# Altium PCB H_bridge_PCB.PcbDoc
Units mil, origin at the board's own origin, x right, y up, seen from the top; angles counter-clockwise.
Board outline 3775 x 4000 mil, 2 copper layers (Top Layer, Bottom Layer); 43 components, 40 nets, 147 pads, 0 vias.
Unrouted connection lines stored in the file: 88.
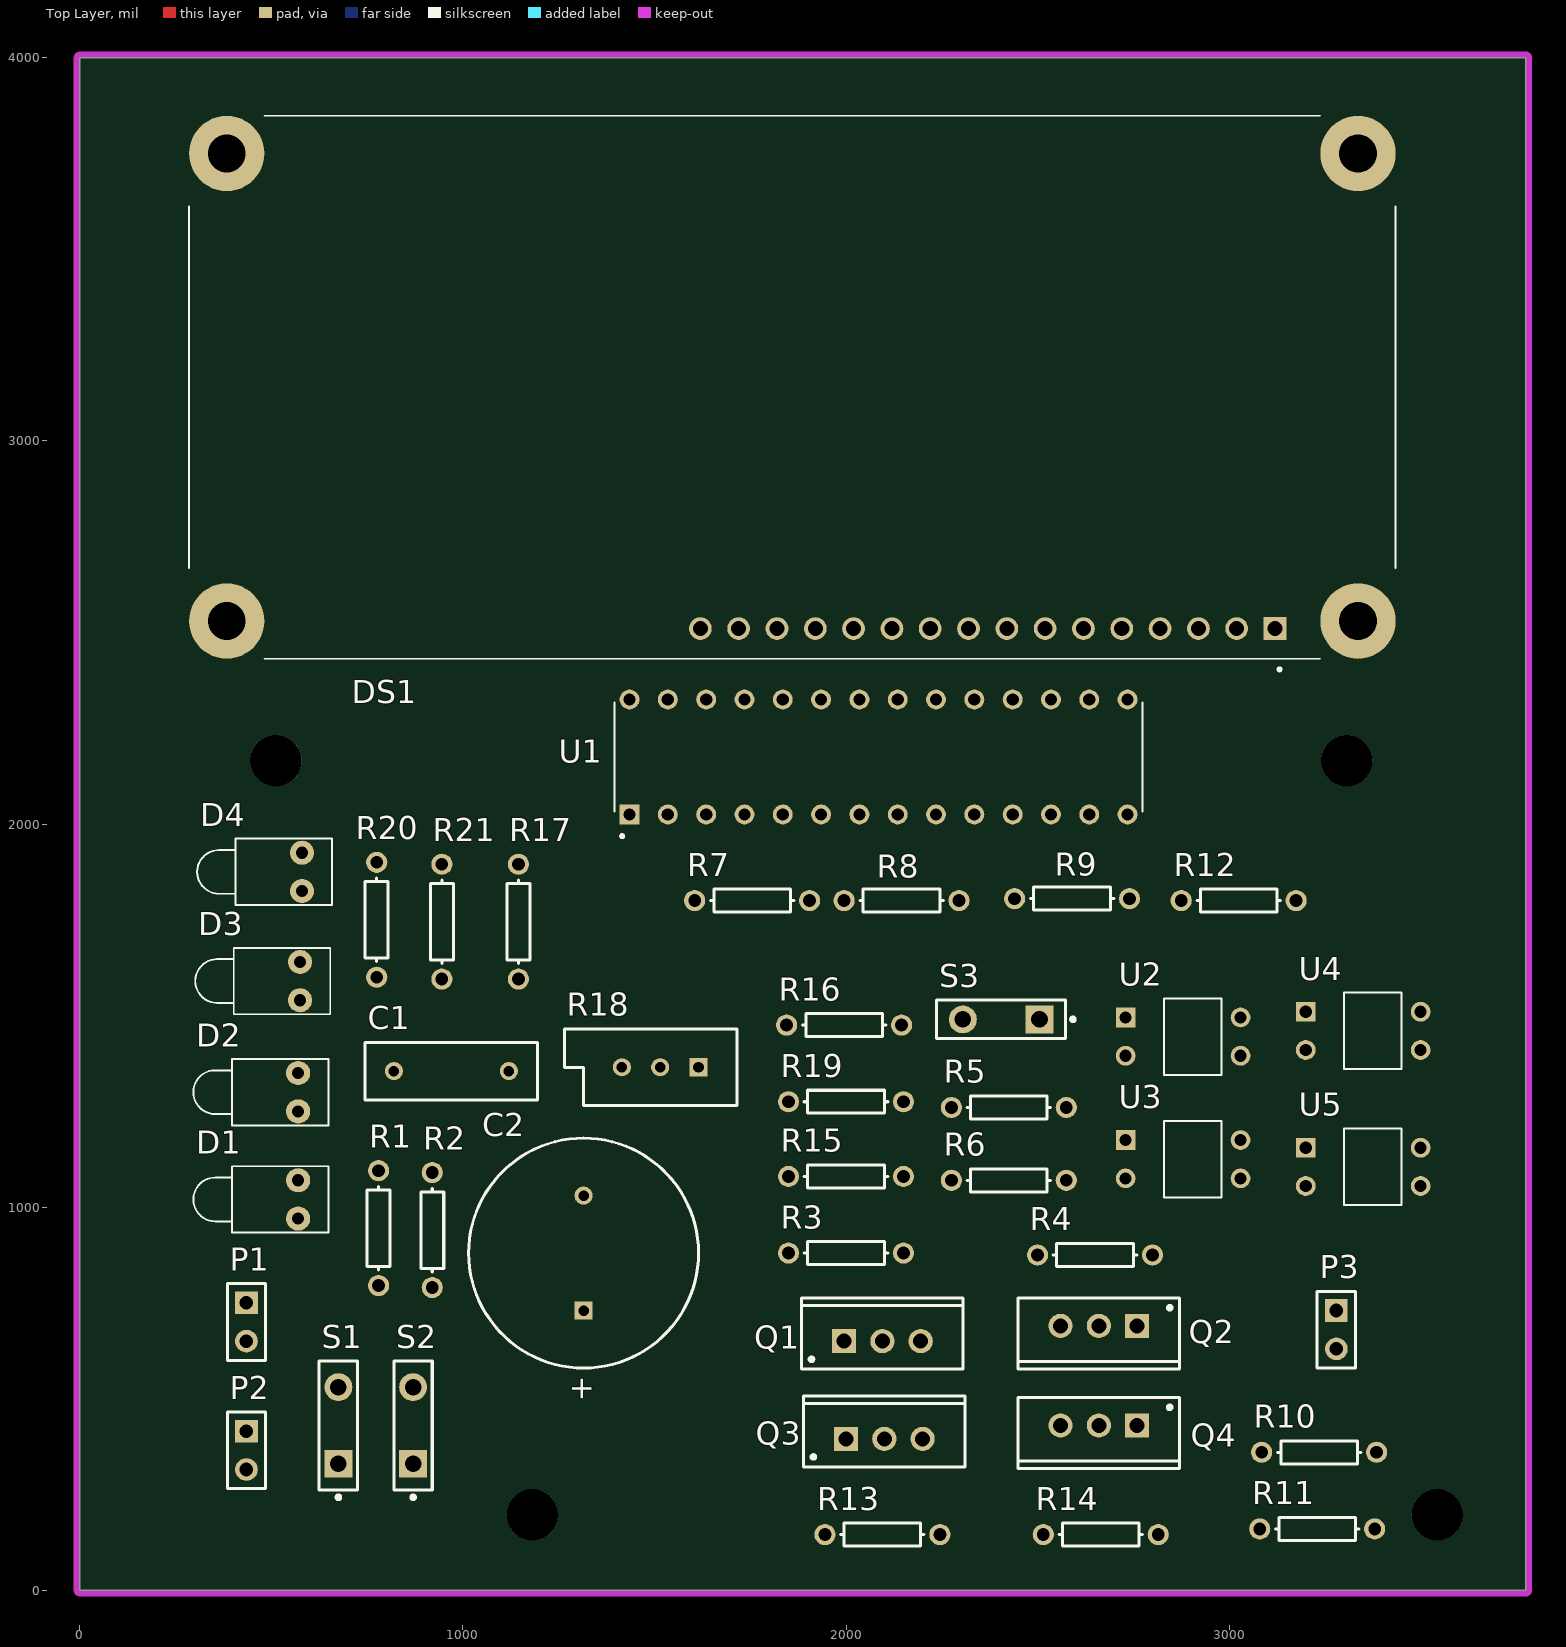
[diagram p0: Top Layer view]
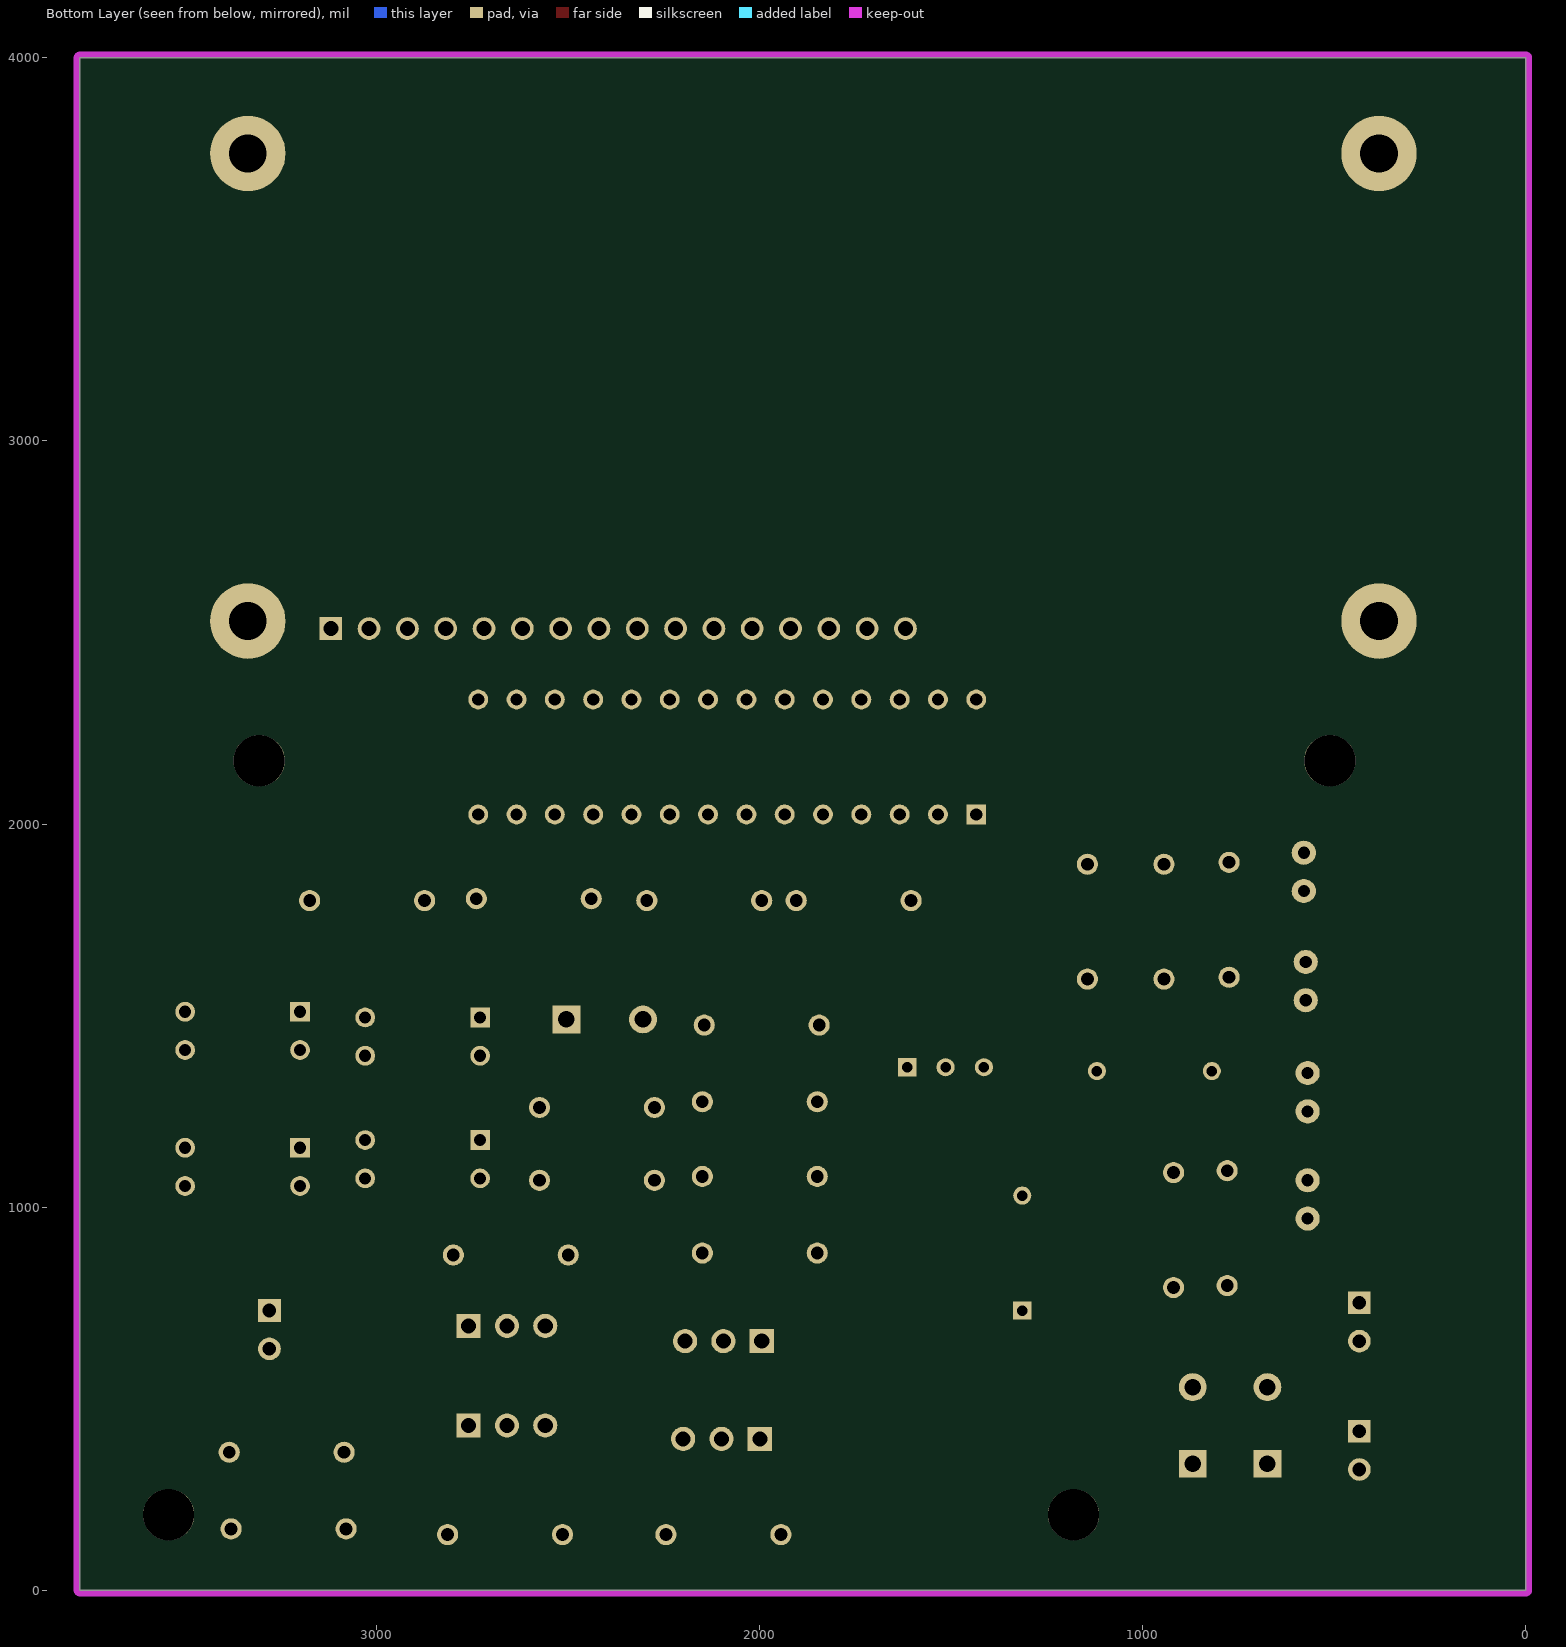
[diagram p1: Bottom Layer view, seen from below]

## Layer stack, top to bottom
Top Solder: solder mask 0.4, Solder Resist, Dk 3.5
Top Layer: signal copper 1.4
Dielectric 1: dielectric 12.6, FR-4, Dk 4.8
Bottom Layer: signal copper 1.4
Bottom Solder: solder mask 0.4, Solder Resist, Dk 3.5

## Board outline
0,0 3775,0 3775,4000 0,4000

## Design rules (kind name [scope] priority, off if disabled: settings)
BoardOutlineClearance [All] p1: gap=7.87 ignorepadtopadclearanceinfootprint=FALSE except(15.75: Arc-SplitBarrior Arc-SplitContinuation Track-SplitBarrior Track-SplitContinuation SMDPad-SplitBarrior SMDPad-SplitContinuation THPad-SplitBarrior THPad-SplitContinuation Via-SplitBarrior Via-SplitContinuation Fill-SplitBarrior Fill-SplitContinuation Poly-SplitBarrior Poly-SplitContinuation Region-SplitBarrior Region-SplitContinuation Text-SplitBarrior Text-SplitContinuation)
Clearance "Clearance Bottom Layer" [OnLayer('Bottom Layer')] p1: gap=8 ignorepadtopadclearanceinfootprint=TRUE except(10: Arc-Text Track-Text SMDPad-Text THPad-Text Via-Text Fill-Text Poly-Text Region-Text Text-Text)
Clearance "Clearance Top Layer" [OnLayer('Top Layer')] p2: gap=8 ignorepadtopadclearanceinfootprint=TRUE except(10: Arc-Text Track-Text SMDPad-Text THPad-Text Via-Text Fill-Text Poly-Text Region-Text Text-Text)
Clearance [All] p3: gap=7.87 ignorepadtopadclearanceinfootprint=FALSE except(3.5: Arc-Arc Arc-Track Arc-SMDPad Track-Track Track-SMDPad SMDPad-SMDPad; 5: Arc-Via Track-Via SMDPad-Via THPad-Via Via-Via; 10: Arc-Text Track-Text SMDPad-Text THPad-Text Via-Text Fill-Text Poly-Text Region-Text Text-Text)
HoleSize [All] p1: absolutevalues=TRUE maxlimit=248.03 minlimit=7.87 maxpercent=80.000 minpercent=20.000
MinimumAnnularRing [All] p1: minimumring=3
MinimumSolderMaskSliver [All] p1: minsoldermaskwidth=3.94
PolygonConnect PolygonConnect_1 [All] p1: thpad.connectstyle=Relief thpad.reliefconductorwidth=20 thpad.reliefentries=4 thpad.polygonreliefangle="90 Angle" thpad.airgapwidth=10 smdpad.connectstyle=Relief smdpad.reliefconductorwidth=20 smdpad.reliefentries=4 smdpad.polygonreliefangle="90 Angle" smdpad.airgapwidth=10 via.connectstyle=Direct via.reliefconductorwidth=20 via.reliefentries=4 via.polygonreliefangle="90 Angle" via.airgapwidth=10
RoutingVias [All] p1: holewidth=28 width=50 viastyle="Through Hole" minholewidth=8 minwidth=16 maxholewidth=28 maxwidth=50
SilkToSilkClearance [All] p1: silktosilkclearance=3.94
SilkToSolderMaskClearance [IsPad] p1: minsilkscreentomaskgap=3.94 clearancetoexposedcopper=TRUE
SolderMaskExpansion [All] p1: expansion=4 istentingtop=FALSE
Width POWER [InNetClass('POWER')] p1: maxlimit=25 minlimit=5 preferedwidth=25 minimp=50.000000 maximp=50.000000 favimp=50.000000
Width [InNetClass('SIGNALS')] p2: maxlimit=25 minlimit=5 preferedwidth=15 minimp=50.000000 maximp=50.000000 favimp=50.000000
26 further rules are at their usual default settings.

## Classes and differential pairs
net class SIGNALS: LCD_D4 LCD_D5 LCD_D6 LCD_D7 LCD_EN LCD_RS NetD1_1 NetD2_1 NetD3_1 NetD4_1 NetDS1_3 NetDS1_15 NetP1_2 NetP2_2 NetP3_1 NetP3_2 NetQ1_1 NetQ2_1 NetQ3_1 NetQ4_1 NetR5_1 NetR6_1 NetR7_1 NetR7_2 NetR8_1 NetR8_2 NetR9_1 NetR9_2 NetR10_2 NetR11_2 NetR12_1 NetR12_2 NetR18_3 NetR19_2 NetR20_2 NetR21_2
net class POWER: +5 +12 GND MCUGND
net class LCD_D[4..7]: LCD_D4 LCD_D5 LCD_D6 LCD_D7
component class "U_Power Supply": D1 D3 P1 P3 R1 R2 S1 S3
component class U_Microcontroller: C1 U1
component class U_H_bridge: C2 Q1 Q3 R3 R5 R7 R9 R11 R13 U2 U4 U5
component class Top_level: D3 D4 DS1 P3 R15 R16 R17 R18 R20 R21 S3

## Components (designator, comment, footprint, x,y, rotation, side; value= is the part's Value field where it differs from the comment)
C1 "Cap" RAD-0.3 970,1355 r0 top value=0.1uF
C2 "Cap Pol1" RB7.6-15 1315,880 r270 top value=100uF
D1 "POWER LED" LED-1 570,1020 r180 top
D2 "5V LED" LED-1 570,1300 r180 top
D3 "LED1" LED-1 575,1590 r180 top
D4 "LED1" LED-1 580,1875 r180 top
DS1 "LCD2X16" LCD_LCD2X16 1860,3140 r180 top
P1 "12VIN" HDR1X2 435,750 r270 top
P2 "5VIN" HDR1X2 435,415 r270 top
P3 "OUTPUT" HDR1X2 3280,730 r270 top
Q1 "IRF4905" TO-220AB 2095,650 r0 top
Q2 "IRF4905" TO-220AB 2660,690 r180 top
Q3 "IRLZ44n" TO-220AB 2100,395 r0 top
Q4 "IRLZ44n" TO-220AB 2660,430 r180 top
R1 "Res1" AXIAL-0.3 780,945 r270 top value=510R
R2 "Res1" AXIAL-0.3 920,940 r270 top value=330R
R3 "Res1" AXIAL-0.3 2000,880 r0 top value=470R
R4 "Res1" AXIAL-0.3 2650,875 r180 top value=470R
R5 "Res1" AXIAL-0.3 2425,1260 r180 top value=750R
R6 "Res1" AXIAL-0.3 2425,1070 r0 top value=750R
R7 "Res1" AXIAL-0.3 1755,1800 r0 top value=330R
R8 "Res1" AXIAL-0.3 2145,1800 r0 top value=330R
R9 "Res1" AXIAL-0.3 2590,1805 r180 top value=330R
R10 "Res1" AXIAL-0.3 3235,360 r0 top value=750R
R11 "Res1" AXIAL-0.3 3230,160 r0 top value=750R
R12 "Res1" AXIAL-0.3 3025,1800 r180 top value=330R
R13 "Res1" AXIAL-0.3 2095,145 r0 top value=470R
R14 "Res1" AXIAL-0.3 2665,145 r180 top value=470R
R15 "Res1" AXIAL-0.3 2000,1080 r0 top value=1K
R16 "Res1" AXIAL-0.3 1995,1475 r0 top value=1K
R17 "Res1" AXIAL-0.3 1145,1745 r90 top value=100R
R18 "RPot" VR5 1515,1365 r180 top value=10K
R19 "Res1" AXIAL-0.3 2000,1275 r0 top value=10K
R20 "Res1" AXIAL-0.3 775,1750 r90 top value=330R
R21 "Res1" AXIAL-0.3 945,1745 r90 top value=330R
S1 "POWER SWITCH" SPST-2 675,430 r90 top
S2 "5V Switch" SPST-2 870,430 r90 top
S3 "SW-SPST" SPST-2 2405,1490 r180 top
U1 "PIC16F886-I/SP" DIP762W46P254L3467H457Q28 2085,2175 r90 top
U2 "TLP521-1" TLP521-1 2730,1495 r0 top
U3 "TLP521-1" TLP521-1 2730,1175 r0 top
U4 "TLP521-1" TLP521-1 3200,1510 r0 top
U5 "TLP521-1" TLP521-1 3200,1155 r0 top

## Footprints (in the part's own frame and the unit in brackets; to place one, negate y for a bottom-side part, rotate by r counter-clockwise, add the part's x,y. Pads: shape width x height; smd on the part's side, far side on the other; paste and mask are expansions set on the pad)
AXIAL-0.3 [mm] "Axial Device, Thru-Hole; 2 Leads; 0.3 in Pin Spacing"
  round 1.4 hole 0.85: 1(-3.81,0) 2(3.81,0)
  silkscreen extent -2.77,-0.76 2.77,0.76
DIP762W46P254L3467H457Q28 [mil]
  rect 52x52 hole 32: 1(-150,650)
  round 52 hole 32: 2(-150,550) 3(-150,450) 4(-150,350) 5(-150,250) 6(-150,150) 7(-150,50) 8(-150,-50) 9(-150,-150) 10(-150,-250) 11(-150,-350) 12(-150,-450) 13(-150,-550) 14(-150,-650) 15(150,-650) 16(150,-550) 17(150,-450) 18(150,-350) 19(150,-250) 20(150,-150) 21(150,-50) 22(150,50) 23(150,150) 24(150,250) 25(150,350) 26(150,450) 27(150,550) 28(150,650)
  silkscreen extent -211,-689 143,689
HDR1X2 [mm] "Connector; Header; 2 Position"
  rect 1.5x1.5 hole 0.9: 1(0,0)
  round 1.5 hole 0.9: 2(2.54,0)
  silkscreen extent -1.27,-1.27 3.81,1.27
LCD_LCD2X16 [mm]
  rect 1.508x1.508 hole 1: 1(-32,16)
  round 1.508 hole 1: 2(-29.46,16) 3(-26.92,16) 4(-24.38,16) 5(-21.84,16) 6(-19.3,16) 7(-16.76,16) 8(-14.22,16) 9(-11.68,16) 10(-9.14,16) 11(-6.6,16) 12(-4.06,16) 13(-1.52,16) 14(1.02,16) 15(3.56,16) 16(6.1,16)
  round 5 hole 2.5: S1(-37.5,15.5) S2(37.5,15.5) S3(37.5,-15.5) S4(-37.5,-15.5)
  silkscreen extent -40,-18 40,18.8
LED-1 [mm] "LED; 2 Leads"
  round 1.6 hole 0.8: 1(0,1.27) 2(0,-1.27)
  silkscreen extent -2,-2.2 6.95,2.2
RAD-0.3 [mm] "Radial Cap, Thru-Hole; 2 Leads; 0.3 in Pin Spacing"
  round 1.2 hole 0.7: 1(-3.81,0) 2(3.81,0)
  silkscreen extent -5.71,-1.91 5.71,1.91
RB7.6-15 [mm] "Polarized Capacitor (Radial); 2 Leads"
  rect 1.2x1.2 hole 0.7: 1(3.81,0)
  round 1.2 hole 0.7: 2(-3.81,0)
  silkscreen extent -7.62,-7.62 7.62,7.62
SPST-2 [mm] "Switch; 2 Leads"
  rect 1.85x1.85 hole 1.1: 1(-2.54,0)
  round 1.85 hole 1.1: 2(2.54,0)
  silkscreen extent -4.89,-1.27 4.28,1.27
TLP521-1 [mm]
  rect 1.308x1.308 hole 0.8: P$1(0,0)
  round 1.308 hole 0.8: P$2(0,-2.54) P$3(7.62,-2.54) P$4(7.62,0)
  silkscreen extent 2.54,-3.81 6.35,1.27
TO-220AB [mm] "TO, Thru-Hole, Vertical, Heatsink Mounted; 3 In-Line Leads; Pitch 2.54 mm"
  rect 1.6x1.6 hole 1: 1(-2.54,0)
  round 1.6 hole 1: 2(0,0) 3(2.54,0)
  silkscreen extent -5.35,-1.85 5.35,2.85, body extent -5.4,-1.9 5.4,2.9, height 19.3
VR5 [mm] "Thru-Hole; 3 Leads"
  rect 1.2x1.2 hole 0.7: 1(-2.54,0)
  round 1.2 hole 0.7: 2(0,0) 3(2.54,0)
  silkscreen extent -5.08,-2.54 6.35,2.54

## Part data
C1: "Capacitor", LatestRevisionDate=17-Jul-2002, LatestRevisionNote="Re-released for DXP Platform.", PackageDescription="Radial Cap, Thru-Hole; 2 Leads; 0.3 in Pin Spacing", PackageReference=RAD-0.3, Published=8-Jun-2000, Publisher="Altium Limited"
C2: "Polarized Capacitor (Radial)", LatestRevisionDate=17-Jul-2002, LatestRevisionNote="Re-released for DXP Platform.", PackageDescription="Polarized Capacitor (Radial); 2 Leads", PackageReference=RB7.6-15, Published=8-Jun-2000, Publisher="Altium Limited"
D1 D2: library part LED1, "Typical RED GaAs LED", LatestRevisionDate=08-Jul-2005, LatestRevisionNote="Mech Layer 1 removed.", PackageDescription="LED; 2 Leads", PackageReference=LED-1, Published=8-Jun-2000, Publisher="Altium Limited"
D3 D4: "Typical RED GaAs LED", LatestRevisionDate=08-Jul-2005, LatestRevisionNote="Mech Layer 1 removed.", PackageDescription="LED; 2 Leads", PackageReference=LED-1, Published=8-Jun-2000, Publisher="Altium Limited"
DS1: "Display; Display: LCD 2x16 characters (blue backlight)", Package=None, Availability=Unavailable, MF=mikroElektronika, MP=LCD2X16, Price=None, SnapEDA_Link=https://www.snapeda.com/parts/LCD2X16/mikroElektronika/view-part/2472530/?ref=snap
P1 P2 P3: library part "Header 2", "Header, 2-Pin", LatestRevisionDate=17-Jul-2002, LatestRevisionNote="Re-released for DXP Platform.", Publisher="Altium Limited"
Q1 Q2: library part PMOS-2, "P-Channel Power MOSFET", ComponentLink1Description="Manufacturer Link", ComponentLink1URL=http://www.irf.com/, DatasheetVersion=PD-9.390D, LatestRevisionDate=17-Jul-2002, LatestRevisionNote="Re-released for DXP Platform.", Note="Pin 4 not drawn and electrically connected to Pin 2.", PackageDescription="TO, Thru-Hole, Vertical, Heatsink Mounted; 3 In-Line Leads; Pitch 2.54 mm", PackageReference=TO-220AB, PackageVersion=Feb-1997, Published=8-Jun-2000, Publisher="Altium Limited"
Q3 Q4: library part NMOS-2, "N-Channel Power MOSFET", ComponentLink1Description="Manufacturer Link", ComponentLink1URL=http://www.irf.com/, DatasheetVersion=PD-9.814, LatestRevisionDate=17-Jul-2002, LatestRevisionNote="Re-released for DXP Platform.", Note="Pin 2 is electrically connected to pin 4.", PackageDescription="TO, Thru-Hole, Vertical, Heatsink Mounted; 3 In-Line Leads; Pitch 2.54 mm", PackageReference=TO-220AB, PackageVersion=Feb-1997, Published=8-Jun-2000, Publisher="Altium Limited"
R1 R2 R3 R4 R5 R6 R7 R8 R9 R10 R11 R12 R13 R14 R15 R16 R17 R19 R20 R21: "Resistor", LatestRevisionDate=17-Jul-2002, LatestRevisionNote="Re-released for DXP Platform.", PackageDescription="Axial Device, Thru-Hole; 2 Leads; 0.3 in Pin Spacing", PackageReference=AXIAL-0.3, Published=8-Jun-2000, Publisher="Altium Limited"
R18: "Potentiometer", LatestRevisionDate=17-Jul-2002, LatestRevisionNote="Re-released for DXP Platform.", PackageDescription="Variable Resistor, Thru-Hole; 3 Leads", PackageReference=VR5, Published=8-Jun-2000, Publisher="Altium Limited", Set Position=0.5, Sim Note="Enter the Resistance value and the set point into parameter fields."
S1 S2: library part SW-SPST, "Single-Pole, Single-Throw Switch", LatestRevisionDate=17-Jul-2002, LatestRevisionNote="Re-released for DXP Platform.", PackageDescription="Switch; 2 Leads", PackageReference=SPST-2, Published=24-Mar-1999, Publisher="Altium Limited"
S3: "Single-Pole, Single-Throw Switch", LatestRevisionDate=17-Jul-2002, LatestRevisionNote="Re-released for DXP Platform.", PackageDescription="Switch; 2 Leads", PackageReference=SPST-2, Published=24-Mar-1999, Publisher="Altium Limited"
U1: "PIC PICÂ® 16F Microcontroller IC 8-Bit 20MHz 14KB _8K x 14_ FLASH 28-SPDIP", Package="DIP-28 Microchip", Availability=Unavailable, MF=Microchip, MP=PIC16F886-I/SP, Price=None, SnapEDA_Link=https://www.snapeda.com/parts/PIC16F886-I/SP/Microchip/view-part/44176/?ref=snap
U2 U3 U4 U5: "ICM006", Package=None, Availability=Unavailable, MF=Isocom, MP=TLP521-1, Price=None, SnapEDA_Link=https://www.snapeda.com/parts/TLP521-1/Isocom/view-part/918682/?ref=snap

## Free pads (board coordinates)
  round 133.86 hole 133.86 unplated: 1(1181.1,196.85) 2(511.81,2165.35) 3(3307.09,2165.35)
  round 133.86 hole 133.86: 4(3543.31,196.85)

## Nets (pads, with @x,y where several pads share a name; then routed paths per layer and width w, separated by ;. In a path a pad name is that pad's centre, name@x,y a point inside that pad or via, vN(x,y) a via of type N, cw(c..) or ccw(c..) an arc to the next point about the centre after c; other vN are vias at no path point)
+5: C1.2 DS1.2 R2.2 R15.1 R17.1 R18.1 S2.2 S3.1 U1.20 U2.P$1 U3.P$1 U4.P$1 U5.P$1
+12: C2.1 Q1.3 Q2.3 R1.2 R3.2 R4.2 S1.2 U4.P$4 U5.P$4
GND: C2.2 D1.2 P1.1 Q3.3 Q4.3 R13.2 R14.2 U2.P$3 U3.P$3
LCD_D4: DS1.11 U1.17
LCD_D5: DS1.12 U1.18
LCD_D6: DS1.13 U1.27
LCD_D7: DS1.14 U1.28
LCD_EN: DS1.6 U1.16
LCD_RS: DS1.4 U1.15
MCUGND: C1.1 D2.2 D3.2 D4.2 DS1.1 DS1.5 DS1.7 DS1.8 DS1.9 DS1.10 DS1.16 P2.1 R16.1 R18.2 R19.1 U1.8 U1.19
NetD1_1: D1.1 R1.1
NetD2_1: D2.1 R2.1
NetD3_1: D3.1 R20.1
NetD4_1: D4.1 R21.1
NetDS1_3: DS1.3 R15.2 R16.2
NetDS1_15: DS1.15 R17.2
NetP1_2: P1.2 S1.1
NetP2_2: P2.2 S2.1
NetP3_1: P3.1 Q1.2 Q3.2
NetP3_2: P3.2 Q2.2 Q4.2
NetQ1_1: Q1.1 R3.1 R5.2
NetQ2_1: Q2.1 R4.1 R6.2
NetQ3_1: Q3.1 R10.1 R13.1
NetQ4_1: Q4.1 R11.1 R14.1
NetR5_1: R5.1 U2.P$4
NetR6_1: R6.1 U3.P$4
NetR7_1: R7.1 U1.3
NetR7_2: R7.2 U2.P$2
NetR8_1: R8.1 U1.4
NetR8_2: R8.2 U3.P$2
NetR9_1: R9.1 U4.P$2
NetR9_2: R9.2 U1.13
NetR10_2: R10.2 U4.P$3
NetR11_2: R11.2 U5.P$3
NetR12_1: R12.1 U5.P$2
NetR12_2: R12.2 U1.23
NetR18_3: R18.3 U1.2
NetR19_2: R19.2 S3.2 U1.11
NetR20_2: R20.2 U1.22
NetR21_2: R21.2 U1.21
pads on no net: DS1.S1 DS1.S2 DS1.S3 DS1.S4 U1.1 U1.5 U1.6 U1.7 U1.9 U1.10 U1.12 U1.14 U1.24 U1.25 U1.26

## Keep-outs
Keep-Out Layer:
  lines w16: -8,0 ccw(c0,0) 0,-8 ; -8,0 ccw(c0,0) 0,-8 ; -8,0 -8,4000 ; -8,4000 cw(c0,4000) 0,4008 ; -8,4000 cw(c0,4000) 0,4008 ; 0,-8 3775,-8 ; 0,4008 3775,4008 ; 3775,-8 ccw(c3775,0) 3783,0 ; 3775,-8 ccw(c3775,0) 3783,0 ; 3775,4008 cw(c3775,4000) 3783,4000 ; 3775,4008 cw(c3775,4000) 3783,4000 ; 3783,0 3783,4000

## Silkscreen, mask and mechanical layers (free items; w line width, h text height)
Route Tool Path:
  lines w8: -4,0 ccw(c0,0) 0,-4 ; -4,0 ccw(c0,0) 0,-4 ; -4,0 ccw(c0,0) 0,-4 ; -4,0 ccw(c0,0) 0,-4 ; -4,0 -4,4000 ; -4,0 -4,4000 ; -4,4000 cw(c0,4000) 0,4004 ; -4,4000 cw(c0,4000) 0,4004 ; -4,4000 cw(c0,4000) 0,4004 ; -4,4000 cw(c0,4000) 0,4004 ; 0,-4 3775,-4 ; 0,-4 3775,-4 ; 0,4004 3775,4004 ; 0,4004 3775,4004 ; 3775,-4 ccw(c3775,0) 3779,0 ; 3775,-4 ccw(c3775,0) 3779,0 ; 3775,-4 ccw(c3775,0) 3779,0 ; 3775,-4 ccw(c3775,0) 3779,0 ; 3775,4004 cw(c3775,4000) 3779,4000 ; 3775,4004 cw(c3775,4000) 3779,4000 ; 3775,4004 cw(c3775,4000) 3779,4000 ; 3775,4004 cw(c3775,4000) 3779,4000 ; 3779,0 3779,4000 ; 3779,0 3779,4000 ; 136,0 ccw(c140,0) 140,-4 cw(c140,0) 136,0 ; 136,4000 cw(c140,4000) 140,4004 ccw(c140,4000) 136,4000

## Text inside footprints (layer, text, board x,y; h text height)
C2: Top Overlay "+" at 1285.99,559.85 h59.06 r270